# EAGLE board Arduino_reduced (EAGLE 6.5.0)
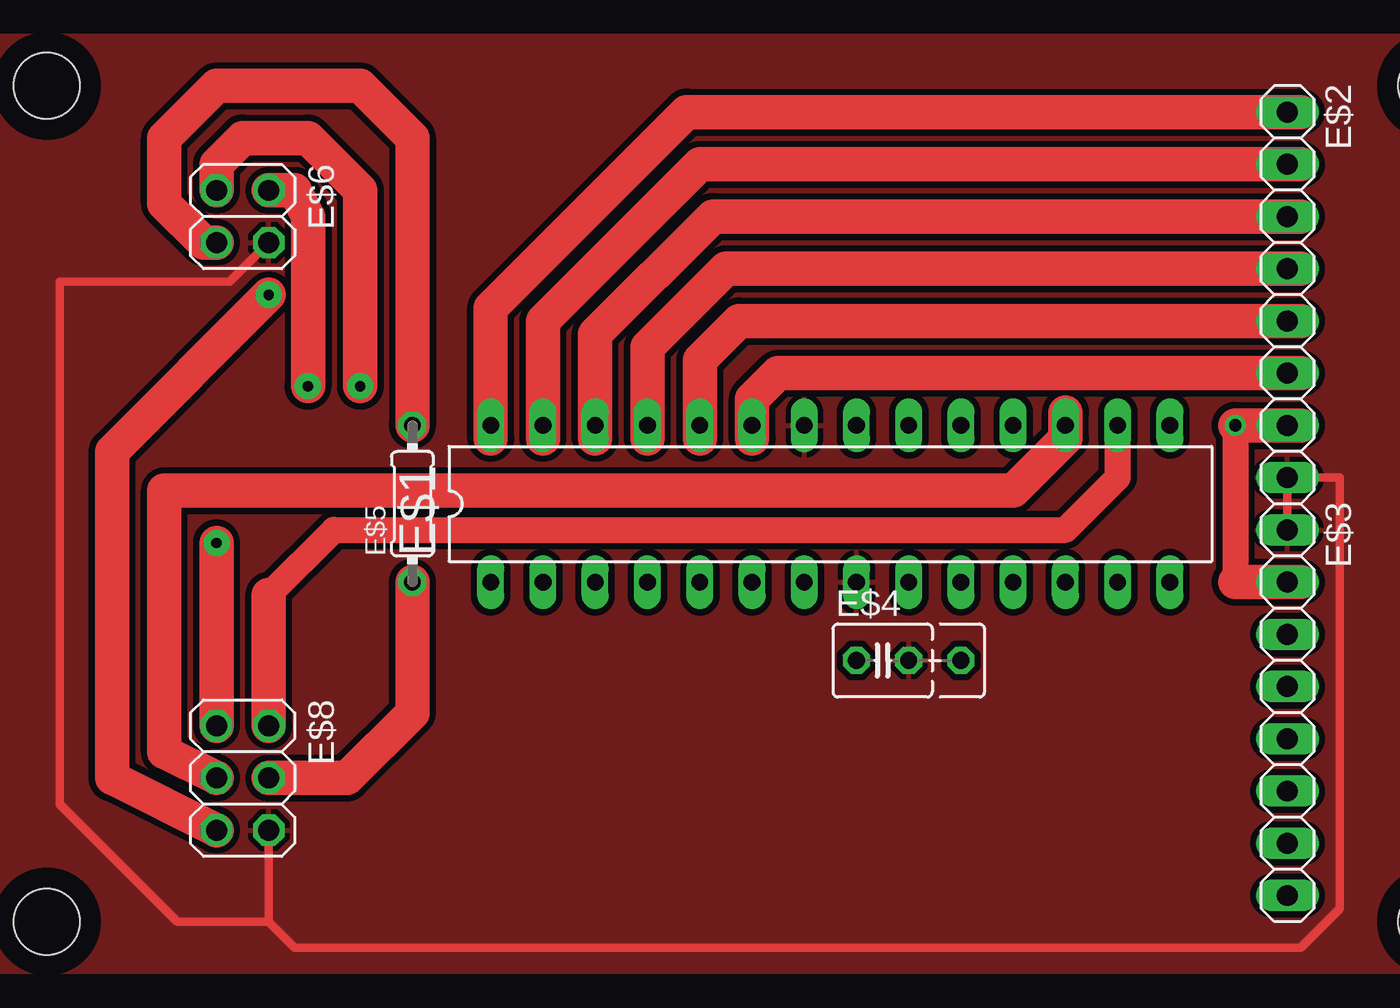
[diagram p0: board, top side]
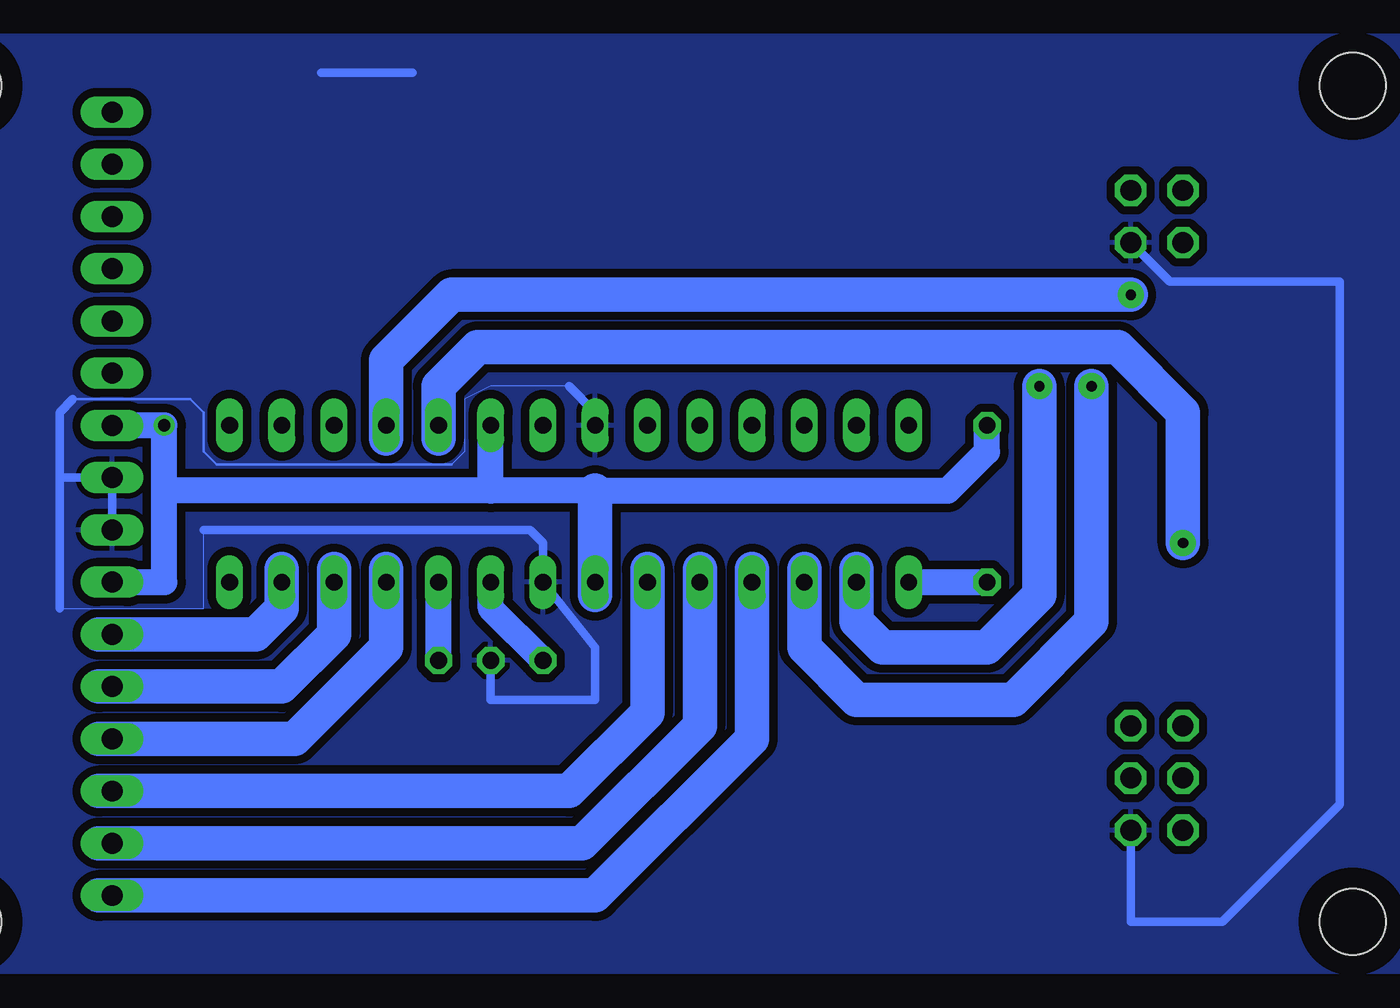
[diagram p1: board, bottom side, seen from below]

No outline drawn. Coordinates in mm, seen from the top.
Copper layers (1*16): Top 0.035mm / dielectric 1.5mm / Bottom 0.035mm
Design rules "default": minimum track width 10mil, minimum drill 24mil, track to track 8mil, track to pad 8mil, pad to pad 8mil, via to via 8mil, smd to smd 8mil, copper to edge 40mil, drill to drill 8mil, minimum pad ring 10mil, minimum via ring 8mil, stop-mask expansion 4mil, vias tented up to drill 0mil, thermal gap 10mil
Holes 3.2 mm at 2.54,43.18 2.54,2.54 69.85,43.18 69.85,2.54

## Footprints (pad centres in the part's own frame; a part is rotated, then mirrored left to right if it is on the bottom)
DIL28-3 = drill 0.813 long: 1 -16.51,-3.81; 2 -13.97,-3.81; 3 -11.43,-3.81; 4 -8.89,-3.81; 5 -6.35,-3.81; 6 -3.81,-3.81; 7 -1.27,-3.81; 8 1.27,-3.81; 9 3.81,-3.81; 10 6.35,-3.81; 11 8.89,-3.81; 12 11.43,-3.81; 13 13.97,-3.81; 14 16.51,-3.81; 15 16.51,3.81; 16 13.97,3.81; 17 11.43,3.81; 18 8.89,3.81; 19 6.35,3.81; 20 3.81,3.81; 21 1.27,3.81; 22 -1.27,3.81; 23 -3.81,3.81; 24 -6.35,3.81; 25 -8.89,3.81; 26 -11.43,3.81; 27 -13.97,3.81; 28 -16.51,3.81
1X08 = drill 1.016 long: 1 -8.89,0; 2 -6.35,0; 3 -3.81,0; 4 -1.27,0; 5 1.27,0; 6 3.81,0; 7 6.35,0; 8 8.89,0
C025_050-035X075 = drill 0.813 octagon: 1 -1.27,0; 2 1.27,0; 3 3.81,0
0204/7 = drill 0.813 octagon: 1 -3.81,0; 2 3.81,0
2X02 = drill 1.016 octagon: 1 -1.27,-1.27; 2 -1.27,1.27; 3 1.27,-1.27; 4 1.27,1.27
2X03 = drill 1.016 octagon: 1 -2.54,-1.27; 2 -2.54,1.27; 3 0,-1.27; 4 0,1.27; 5 2.54,-1.27; 6 2.54,1.27

## Placement (x,y rotation side)
E$1  [DIL28-3]  40.64,22.86 0 top
E$2  [1X08]  62.87,33.02 270 top
E$3  [1X08]  62.87,12.7 270 top
E$4  [C025_050-035X075]  43.18,15.24 0 top
E$5  [0204/7]  20.32,22.86 90 top
E$6  [2X02]  12.06,36.83 270 top
E$8  [2X03]  12.06,9.53 270 top

## Library data of the parts
E$1 = atmel
E$2 E$3 E$6 E$8 = pinhead
E$4 E$5 = rcl

## Nets
GND: E$1.8 E$1.22 E$2.8 E$3.1 E$4.2 E$6.4 E$8.6
S$1: E$1.7 E$1.20 E$2.7 E$3.2 E$5.2 E$6.3
S$2: E$1.23 E$2.6
S$3: E$1.24 E$2.5
S$4: E$1.25 E$2.4
S$5: E$1.26 E$2.3
S$6: E$1.27 E$2.2
S$7: E$1.28 E$2.1
S$9: E$3.3
S$13: E$1.12 E$3.4
S$14: E$1.9 E$4.1
S$15: E$1.10 E$4.3
S$16: E$1.11 E$3.5
S$17: E$1.6
S$18: E$1.16 E$8.2
S$20: E$1.5 E$3.7
S$22: E$1.17 E$8.3
S$23: E$1.18 E$8.5
S$24: E$1.3 E$6.2
S$25: E$1.1 E$5.1 E$8.4
S$28: E$1.4 E$3.8
S$30: E$1.19 E$8.1
S$32: E$1.2 E$6.1

## Tracks (layer width: path | path; a pad name or v marks a point on that pad's centre or on a via)
GND
  Top 0.406: E$3.1 E$2.8 65.41,24.13 65.41,3.17 63.5,1.27 14.61,1.27 13.34,2.54 | E$8.6 13.34,2.54 | 13.34,2.54 8.89,2.54 3.17,8.26 3.17,33.66 11.43,33.66 E$6.4
  Bottom 0: 65.41,17.78 58.42,17.78 58.42,21.59 | 40.64,28.57 44.45,28.57 45.72,27.94 45.72,25.4 46.35,24.77
  Bottom 0.127: 46.35,24.77 57.78,24.77 58.42,25.4 58.42,27.3 59.05,27.94 64.77,27.94
  Bottom 0.406: E$3.1 E$2.8 65.41,24.13 | 65.41,24.13 65.41,17.78 | E$4.2 44.45,13.34 39.37,13.34 39.37,15.88 E$1.8 41.91,20.95 42.55,21.59 58.42,21.59 | E$8.6 13.34,2.54 8.89,2.54 3.17,8.26 3.17,33.66 11.43,33.66 E$6.4 | E$1.22 39.37,27.3 40.64,28.57 | 64.77,27.94 65.41,27.3 65.41,24.13 | 48.26,43.81 52.7,43.81
  pour Bottom (isolate 0.406, rank 6): 0,0 0,45.72 72.39,45.72 72.39,0
  pour Top (isolate 0.305, rank 6): 0,45.72 72.39,45.72 72.39,0 0,0
S$1  (via drill 0.5 pad 1.27, 0.6 pad 0.81)
  Top 1.27: v60.33,26.67 60.33,19.05
  Top 1.676: v60.33,26.67 63.5,26.67 | 60.33,19.05 63.5,19.05 | E$6.3 10.16,35.56 8.26,37.47 8.26,40.64 10.79,43.18 17.78,43.18 20.32,40.64 E$5.2
  Bottom 1.27: E$1.7 39.37,23.5 | 39.37,23.5 44.45,23.5 | 44.45,23.5 E$1.20 | 44.45,23.5 60.33,23.5 | 60.33,23.5 v60.33,26.67 E$2.7 | E$3.2 60.33,19.05 60.33,23.5 | 39.37,23.5 22.23,23.5 20.32,25.4 E$5.2
  Bottom 1.676: 39.37,23.5 39.37,18.41
  other vias: 20.32,26.67
S$2
  Top 1.27: E$1.23 36.83,27.94 | 38.1,29.21 E$2.6
  Top 1.676: 36.83,26.04 36.83,27.94 38.1,29.21 63.5,29.21
S$3
  Top 1.27: E$1.24 34.29,29.84 | 36.2,31.75 E$2.5
  Top 1.676: 34.29,26.04 34.29,29.84 36.2,31.75 63.5,31.75
S$4
  Top 1.27: E$1.25 31.75,30.48
  Top 1.676: 31.75,26.04 31.75,30.48 35.56,34.29 E$2.4 63.5,34.29
S$5
  Top 1.27: E$1.26 29.21,31.11 | 34.92,36.83 E$2.3
  Top 1.676: 29.21,26.04 29.21,31.11 34.92,36.83 63.5,36.83
S$6
  Top 1.27: E$1.27 26.67,31.75 | 34.29,39.37 E$2.2
  Top 1.676: 26.67,26.04 26.67,31.75 34.29,39.37 63.5,39.37
S$7
  Top 1.27: E$1.28 24.13,32.38 | 33.66,41.91 E$2.1
  Top 1.676: 24.13,26.04 24.13,32.38 33.66,41.91 63.5,41.91
S$9
  Bottom 1.27: 55.88,16.51 E$3.3
  Bottom 1.676: 54.61,19.68 54.61,17.78 55.88,16.51 63.5,16.51
S$13
  Bottom 1.27: E$1.12 52.07,16.51 | 54.61,13.97 E$3.4
  Bottom 1.676: 52.07,19.68 52.07,16.51 54.61,13.97 63.5,13.97
S$14
  Bottom 1.27: E$4.1 44.45,17.78 E$1.9
S$15
  Bottom 1.27: E$4.3 E$1.10
S$16
  Bottom 1.27: E$1.11 49.53,15.88 | 53.98,11.43 E$3.5
  Bottom 1.676: 49.53,19.68 49.53,15.88 53.98,11.43 63.5,11.43
S$17
  Bottom 1.27: E$1.6 36.83,12.7 | 40.64,8.89 62.87,8.89
  Bottom 1.676: 36.83,19.68 36.83,12.7 40.64,8.89 63.5,8.89
S$18
  Top 1.27: 13.34,18.41 16.51,21.59 52.07,21.59 54.61,24.13 E$1.16
  Top 1.676: E$8.2 13.34,18.41
S$20
  Bottom 1.27: E$1.5 34.29,12.06 | 40.01,6.35 E$3.7
  Bottom 1.676: 34.29,19.68 34.29,12.06 40.01,6.35 63.5,6.35
S$22
  Top 0.61: 52.07,26.04 52.07,25.4 49.53,23.5
  Top 1.27: E$1.17 52.07,26.04
  Top 1.676: E$8.3 8.26,10.79 8.26,23.5 49.53,23.5 52.07,26.04 52.07,27.3
S$23  (via drill 0.5 pad 1.27)
  Top 1.676: E$8.5 5.71,9.53 5.71,25.4 v13.34,33.02
  Bottom 1.27: 49.53,29.84 E$1.18
  Bottom 1.676: v13.34,33.02 46.35,33.02 49.53,29.84 49.53,26.04
S$24  (via drill 0.5 pad 1.27)
  Top 1.676: E$6.2 14.61,38.1 15.24,36.83 v15.24,28.57
  Bottom 1.27: 29.21,15.88 E$1.3
  Bottom 1.676: v15.24,28.57 15.24,17.14 19.05,13.34 26.67,13.34 29.21,15.88 29.21,19.68
S$25
  Top 1.676: E$8.4 17.14,9.53 20.32,12.7 E$5.1
  Bottom 1.27: E$1.1 E$5.1
S$28
  Bottom 1.27: E$1.4 31.75,11.43 | 39.37,3.81 E$3.8
  Bottom 1.676: 31.75,19.68 31.75,11.43 39.37,3.81 63.5,3.81
S$30  (via drill 0.5 pad 1.27)
  Top 1.676: E$8.1 v10.79,20.95
  Bottom 0.61: E$1.19 46.99,28.57
  Bottom 1.676: v10.79,20.95 10.79,27.3 13.97,30.48 45.09,30.48 46.99,28.57 46.99,26.04
S$32  (via drill 0.5 pad 1.27)
  Top 1.676: E$6.1 10.79,39.37 12.06,40.64 15.24,40.64 17.78,38.1 v17.78,28.57
  Bottom 1.27: 26.67,17.14 E$1.2
  Bottom 1.676: v17.78,28.57 17.78,18.41 20.32,15.88 25.4,15.88 26.67,17.14 26.67,19.68